# Altium PCB PCB.PcbDoc
Units mm, origin at the board's own origin, x right, y up, seen from the top; angles counter-clockwise.
Board outline 113.79 x 103.63 mm, 2 copper layers (Top Layer, Bottom Layer); 31 components, 25 nets, 89 pads, 6 vias.
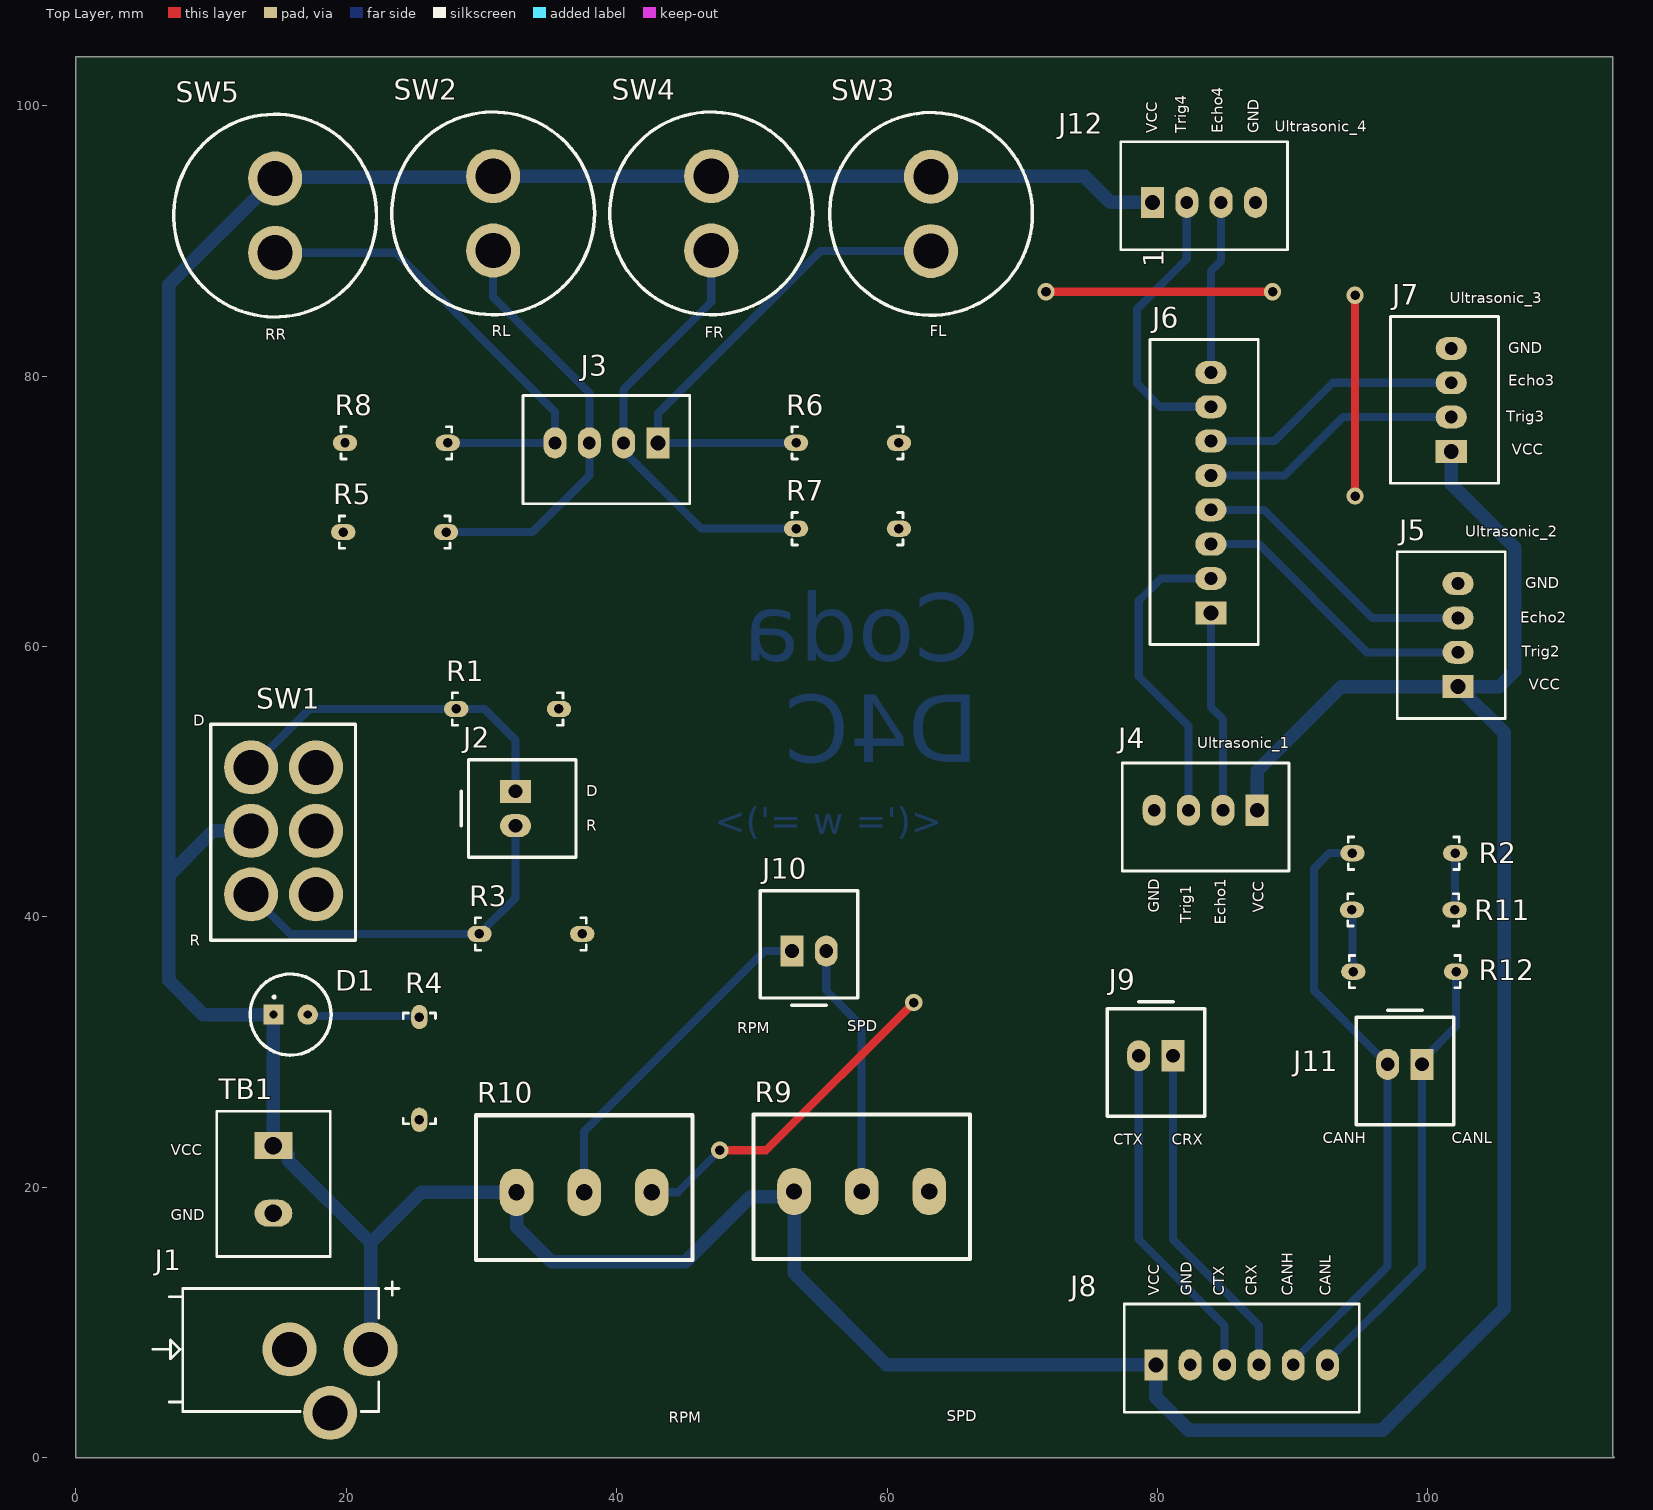
[diagram p0: Top Layer view]
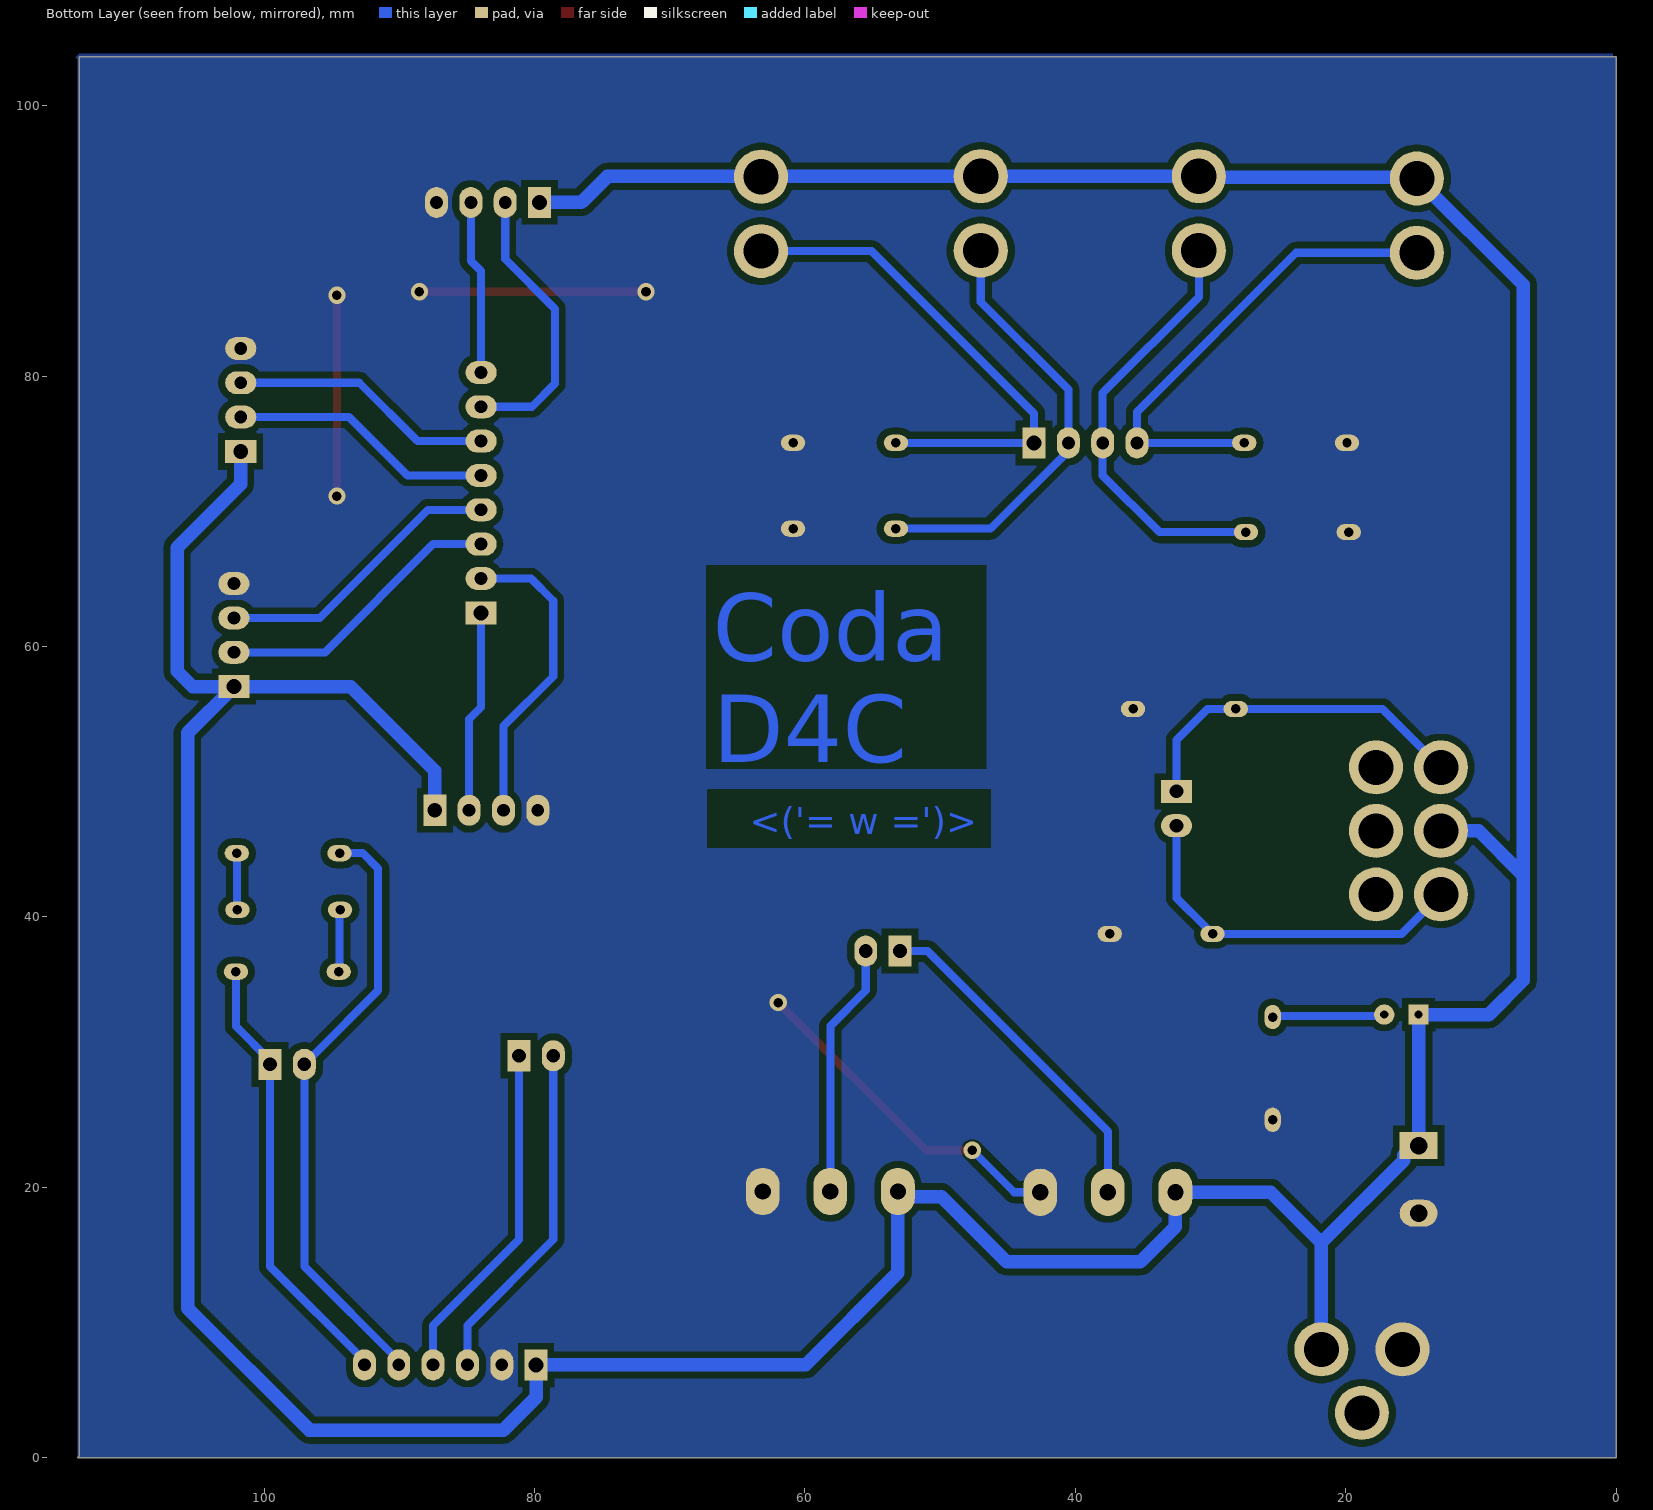
[diagram p1: Bottom Layer view, seen from below]
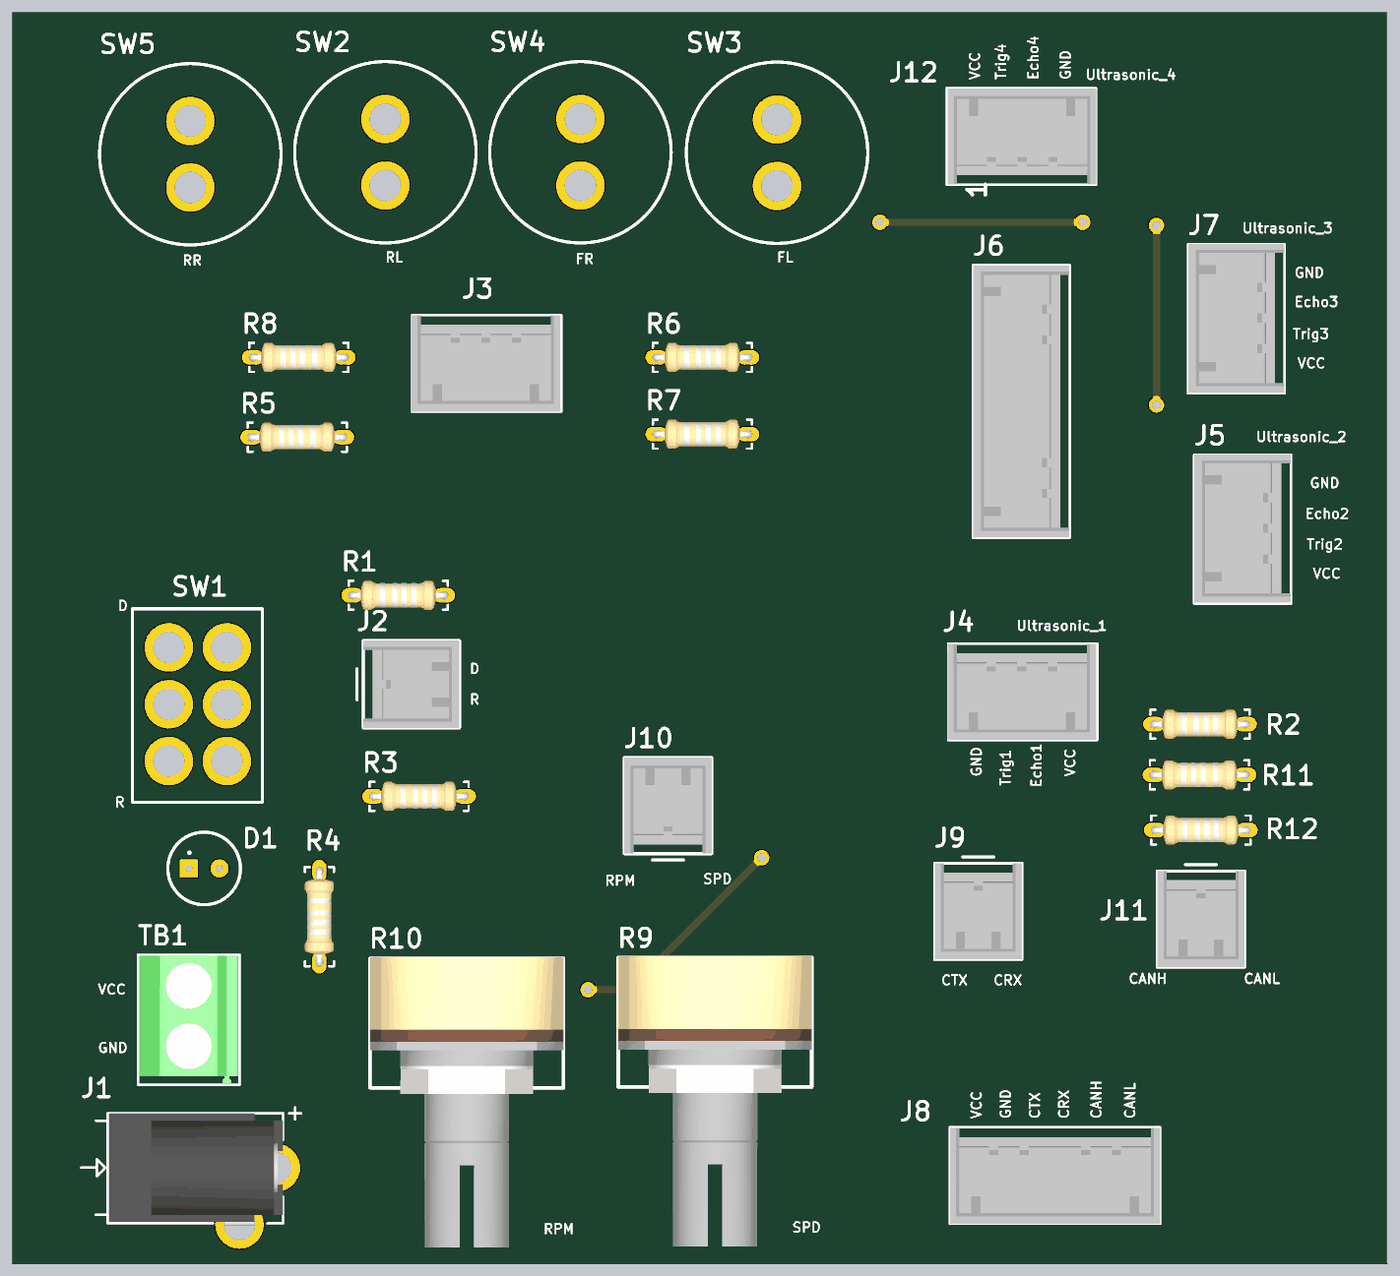
[diagram p2: 3D render of the assembled board from above, using the file's embedded part models]

## Layer stack, top to bottom
Top Solder: solder mask 0.0102, Solder Resist, Dk 3.5
Top Layer: signal copper 0.0356
Dielectric 1: dielectric 0.32, FR-4, Dk 4.8
Bottom Layer: signal copper 0.0356
Bottom Solder: solder mask 0.0102, Solder Resist, Dk 3.5

## Board outline
0,0 113.792,0 113.665,0.127 113.665,103.632 0,103.632

## Design rules (kind name [scope] priority, off if disabled: settings)
Clearance [All] p1: gap=0.5 ignorepadtopadclearanceinfootprint=FALSE
PolygonConnect [All] p1: connectstyle=Direct reliefconductorwidth=0.254 reliefentries=4 polygonreliefangle="90 Angle" airgapwidth=0.254
RoutingVias [All] p1: holewidth=0.711 width=1.27 viastyle="Through Hole" minholewidth=0.711 minwidth=1.27 maxholewidth=0.711 maxwidth=1.27
SolderMaskExpansion [All] p1: expansion=0.102 istentingtop=FALSE
Width [All] p1: maxlimit=1 minlimit=0.4 preferedwidth=0.6 minimp=50.000000 maximp=50.000000 favimp=50.000000
30 further rules are at their usual default settings.

## Components (designator, comment, footprint, x,y, rotation, side; value= is the part's Value field where it differs from the comment)
D1 "LED_TH_5mm" LED_TH_5mm 14.605,32.766 r0 top
J1 "Barrel Power Jack" pwr_Jack 21.799,8.001 r90 top
J2 "HDR SCK 1*2 100MILS" "DHDR 1*2 2,54MM" 32.512,48.006 r0 top
J3 "Data HDR 1x4 2.54mm" DHDR_1x4_2.54mm 37.973,75.057 r270 top
J4 "Ultrasonic_FL" DHDR_1x4_2.54mm 82.296,47.879 r270 top
J5 "Ultrasonic_FR" DHDR_1x4_2.54mm 102.235,62.103 r180 top
J6 "Data HDR 1x8 2.54mm" DHDR_1x8_2.54mm 83.947,62.484 r180 top
J7 "Ultrasonic_RL" DHDR_1x4_2.54mm 101.727,79.502 r180 top
J8 "MCP2551" DHDR_1x6_2.54mm 86.233,6.858 r90 top
J9 "HDR SCK 1*2 100MILS" "DHDR 1*2 2,54MM" 79.883,29.718 r270 top
J10 "HDR SCK 1*2 100MILS" "DHDR 1*2 2,54MM" 54.229,37.465 r90 top
J11 "HDR SCK 1*2 100MILS" "DHDR 1*2 2,54MM" 98.298,29.083 r270 top
J12 "Ultrasonic_RR" DHDR_1x4_2.54mm 84.709,92.837 r90 top
R1 "10k" R_THT_CFR-25 34.925,55.372 r180 top
R2 "100" R_THT_CFR-25 101.219,44.704 r180 top
R3 "10k" R_THT_CFR-25 36.645,38.735 r180 top
R4 "10k" R_THT_CFR-25 25.4,25.781 r90 top
R5 "10k" R_THT_CFR-25 20.574,68.453 r0 top
R6 "10k" R_THT_CFR-25 60.071,75.057 r180 top
R7 "10k" R_THT_CFR-25 60.071,68.707 r180 top
R8 "10k" R_THT_CFR-25 20.701,75.057 r0 top
R9 "Speed" POT 58.119,19.685 r0 top
R10 "RPM" POT 37.592,19.62 r0 top
R11 "10" R_THT_CFR-25 95.181,40.513 r0 top
R12 "10" R_THT_CFR-25 101.288,35.941 r180 top
SW1 "1825910-6" DPDT_6Pin 12.629,50.68 r270 top
SW2 "1825910-6" Push_Button_10mm_2Pin 30.861,89.281 r90 top
SW3 "1825910-6" Push_Button_10mm_2Pin 63.246,89.242 r90 top
SW4 "1825910-6" Push_Button_10mm_2Pin 46.99,89.281 r90 top
SW5 "1825910-6" Push_Button_10mm_2Pin 14.732,89.115 r90 top
TB1 "TERM 1x2 5mm" Terminal_5mm 14.605,20.574 r0 top

## Footprints (in the part's own frame and the unit in brackets; to place one, negate y for a bottom-side part, rotate by r counter-clockwise, add the part's x,y. Pads: shape width x height; smd on the part's side, far side on the other; paste and mask are expansions set on the pad)
"DHDR 1*2 2,54MM" [mm]
  rect 2.3x1.7 hole 1.016: 1(0,1.27)
  oval 2.3x1.7 hole 1.016: 2(0,-1.27)
  silkscreen extent -4,-3.61 4.48,3.61, body extent -3.47,-3.61 4.48,3.61, height 10.43
DHDR_1x4_2.54mm [mm]
  rect 2.3x1.7 hole 1.1: 1(0,5.08)
  oval 2.3x1.7 hole 0.95: 2(0,2.54) 3(0,0) 4(0,-2.54)
  silkscreen extent -3.5,-4.9 4.5,7.43, body extent -3.47,-4.95 4.48,7.34, height 10.43
DHDR_1x6_2.54mm [mm]
  rect 2.3x1.7 hole 1.1: 1(0,6.35)
  oval 2.3x1.7 hole 0.95: 2(0,3.81) 3(0,1.27) 4(0,-1.27) 5(0,-3.81) 6(0,-6.35)
  silkscreen extent -3.5,-8.7 4.5,8.7, body extent -3.51,-8.69 4.44,8.69, height 10.43
DHDR_1x8_2.54mm [mm]
  rect 2.3x1.7 hole 1.1: 1(0,0)
  oval 2.3x1.7 hole 0.95: 2(0,-2.54) 3(0,-5.08) 4(0,-7.62) 5(0,-10.16) 6(0,-12.7) 7(0,-15.24) 8(0,-17.78)
  silkscreen extent -3.5,-20.22 4.5,2.35, body extent -3.47,-20.17 4.48,2.29, height 10.43
DPDT_6Pin [mm]
  round 4 hole 2.6: 1(-0.375,5.125) 2(-0.375,0.325) 3(4.325,5.125) 4(4.325,0.325) 5(9.025,5.125) 6(9.025,0.325)
  silkscreen extent -3.58,-2.68 12.42,8.05, body extent -2.73,-4.2 11.47,10, height 19.77
LED_TH_5mm [mm]
  rect 1.5x1.5 hole 0.6: A(0,0)
  round 1.5 hole 0.6: C(2.54,0)
  silkscreen extent -1.73,-3 4.27,3
POT [mm]
  oval 2.5x3.5 hole 1.2: 1(-5,0) 2(5,0) 3(0,0)
  silkscreen extent -8,-5 8,5.7, body extent -8,-18.2 8,5.8, height 21
Push_Button_10mm_2Pin [mm]
  round 4 hole 2.6: 1(0,0) 2(5.5,0)
  silkscreen extent -4.75,-7.5 10.25,7.5, body extent -3.21,-5.92 8.81,6.1, height 5.99
pwr_Jack [mm]
  round 4 hole 2.6: 1(0,0) 2(-4.7,3) 3(0,6)
  silkscreen extent -4.6,-2.1 5,16.1, body extent -4.8,-0.6 4.5,13.8, height 11.01
R_THT_CFR-25 [mm]
  oval 1.8x1.2 hole 0.7: 1(-0.8,0) 2(6.8,0)
  silkscreen extent -1.1,-1.2 7.1,1.2, body extent -1.08,-1.2 7.09,1.2, height 1.9
Terminal_5mm [mm]
  rect 2.8x2 hole 1.3: 1(0,2.5)
  oval 2.8x2 hole 1.3: 2(0,-2.5)
  silkscreen extent -4.2,-5.7 4.2,5.05, body extent -4.08,-5.58 4.07,4.98, height 10.01

## Part data
J1: library part Con-Jack, "DC-Power Socket 12V 5A 2, 1mm Solder Eyel", Current Rating=5A, Manufacturer 1=Cliff, Manufacturer Part Number 1=FC68148, Supplier Part Number 1=735742, ComponentLink1Description=http://www.farnell.com/datasheets/317160.pdf?src-supplier=Farnell, ComponentLink1URL=http://www.farnell.com/datasheets/317160.pdf?src-supplier=Farnell, ComponentLink2Description=http://www.rapidonline.com/pdf/735742_da_en_01.pdf?src-supplier=Rapid+Electronics, ComponentLink2URL=http://www.rapidonline.com/pdf/735742_da_en_01.pdf?src-supplier=Rapid+Electronics, ComponentLink3Description=http://www.produktinfo.conrad.com/datenblaetter/725000-749999/735742-da-01-en-DC_BUCHSE_2_1MM_FC68148.pdf?src-supplier=Conrad, ComponentLink3URL=http://www.produktinfo.conrad.com/datenblaetter/725000-749999/735742-da-01-en-DC_BUCHSE_2_1MM_FC68148.pdf?src-supplier=Conrad, Connector Type=Socket, Height=0.25inch, Inside Diameter=6.3mm, Length=5inch, Orientation="Right Angle", Parameter Name 1=Bulk, RoHS=Yes, Supplier 1=Conrad, Weight=0.1lb, Width=3inch
J2 J9 J10 J11: library part "2-Pin Data Connector", "Conn Shrouded Header HDR 2 POS 2.54mm Solder ST Thru-Hole", Color=Black, Contact Current Rating=5A, Contact Resistance=6mR, Flammability Rating="UL94 V-0", Manufacturer 1="TE Connectivity", Manufacturer Part Number 1=2-644861-2, Max Operating Temperature=221°C, Max Voltage Rating (AC)=250V, Min Operating Temperature=-67°C, Package Quantity=500, Supplier Part Number 1=A30931-ND, Approvals=CSA, Backwall/Post Interruptions="No (Without)", ComponentLink1Description=https://datasheet.ciiva.com/16303/eng-ds-82056-mta-0608-16303634.pdf?src-supplier=Future+Electronics, ComponentLink1URL=https://datasheet.ciiva.com/16303/eng-ds-82056-mta-0608-16303634.pdf?src-supplier=Future+Electronics, ComponentLink2Description=https://datasheet.ciiva.com/30111/8852eng-ds-82056-mta-0608-30111398.pdf?src-supplier=Onlinecomponents.com, ComponentLink2URL=https://datasheet.ciiva.com/30111/8852eng-ds-82056-mta-0608-30111398.pdf?src-supplier=Onlinecomponents.com, ComponentLink3Description=https://datasheet.ciiva.com/709/eng-cd-644861-n-basefilename-709739.pdf?src-supplier=Digi-Key, ComponentLink3URL=https://datasheet.ciiva.com/709/eng-cd-644861-n-basefilename-709739.pdf?src-supplier=Digi-Key, ComponentLink4Description=https://datasheet.ciiva.com/3118/eng-ds-82056-mta-0608-3118126.pdf?src-supplier=Avnet, ComponentLink4URL=https://datasheet.ciiva.com/3118/eng-ds-82056-mta-0608-3118126.pdf?src-supplier=Avnet, Connector System=Wire-to-Board, Connector Type=Plug,Header,Pin, Contact Gender=Male, Contact Material="Copper Alloy", Contact Mating Length=5.1mm, Contact Plating=Tin,Matte, Contact Post Length=3.56mm, Contact Retention="No (Without)", Contact Shape=Square, Contact Style=Straight, Current Rating=5A, Depth=7.95mm, ELV=Compliant, Fastening Type=Friction, Gender=Male, Height=10.41mm, Housing Color=Black, Housing Material=Polyester, Lead Free="Lead Free", Length=7.21mm, Mating Alignment="Yes (With)", Mating Retention="Yes (With)", Mount="Through Hole", Number of Contacts=2, Number of Positions=2, Number of Rows=1, Orientation=Straight, Packaging=Bag, PCB Mount Alignment="No (Without)", PCB Mount Retention=Without, PCB Mounting Orientation=Vertical, PCB Thickness=0.063inch, Pitch=2.54mm, Plating Thickness=6.3um, Pricing 1="1=0.41000, 10=0.39200, 100=0.27420, 500=0.23506, 1000=0.19588, 5000=0.16790, 10000=0.15670 (USD)", Radiation Hardening=No, REACH SVHC=Unknown, RoHS=Yes, Sealable="No (Without)", Shrouded="Yes (With)", Stock 1=3206, Strain Relief="No (Without)", Supplier 1=Digi-Key, Tail Length=3.56mm, Termination=Solder, Underplate Material=Nickel, Voltage Rating=250V, Voltage Rating (AC)=250V
J3 J4 J5 J7 J12: library part "4-Pin Data Connector", "MTA-100 Series, 2.54mm Pitch 4 Way 1 RowStraight PCB Header, Solder Term, 5A", Color=Black, Contact Current Rating=5A, Contact Resistance=6mR, Flammability Rating="UL94 V-0", Manufacturer 1="TE Connectivity", Manufacturer Part Number 1=2-644861-4, Max Operating Temperature=221°C, Max Voltage Rating (AC)=250V, Min Operating Temperature=-67°C, Package Quantity=500, Supplier Part Number 1=A30933-ND, Approvals=CSA, Backwall/Post Interruptions="No (Without)", ComponentLink1Description=https://datasheet.ciiva.com/7800/1651878-7800290.pdf?src-supplier=Element14, ComponentLink1URL=https://datasheet.ciiva.com/7800/1651878-7800290.pdf?src-supplier=Element14, ComponentLink2Description=https://datasheet.ciiva.com/15175/getdatasheetpartid-36841-15175492.pdf?src-supplier=Verical, ComponentLink2URL=https://datasheet.ciiva.com/15175/getdatasheetpartid-36841-15175492.pdf?src-supplier=Verical, ComponentLink3Description=https://datasheet.ciiva.com/11759/0900766b80f915a0-11759930.pdf?src-supplier=RSComponents, ComponentLink3URL=https://datasheet.ciiva.com/11759/0900766b80f915a0-11759930.pdf?src-supplier=RSComponents, ComponentLink4Description=https://datasheet.ciiva.com/714/eng-cd-644861-n-basefilename-714593.pdf?src-supplier=Digi-Key, ComponentLink4URL=https://datasheet.ciiva.com/714/eng-cd-644861-n-basefilename-714593.pdf?src-supplier=Digi-Key, ComponentLink5Description=https://datasheet.ciiva.com/16684/eng-ds-82056-mta-0608-16684709.pdf?src-supplier=Avnet+Europe, ComponentLink5URL=https://datasheet.ciiva.com/16684/eng-ds-82056-mta-0608-16684709.pdf?src-supplier=Avnet+Europe, ComponentLink6Description=https://datasheet.ciiva.com/16497/eng-ds-82056-mta-0608-16497871.pdf?src-supplier=Avnet+Asia, ComponentLink6URL=https://datasheet.ciiva.com/16497/eng-ds-82056-mta-0608-16497871.pdf?src-supplier=Avnet+Asia, Connector System=Wire-to-Board, Connector Type=Plug,Header,Pin, Contact Gender=Male, Contact Material="Copper Alloy", Contact Mating Length=5.1mm, Contact Plating=Tin,Matte, Contact Post Length=3.56mm, Contact Retention="No (Without)", Contact Shape=Square, Contact Style=Straight, Current Rating=5A, Depth=7.95mm, ELV=Compliant, Fastening Type=Friction, Gender=Male, Height=10.41mm, Housing Color=Black, Housing Material=Polyester, Lead Free="Lead Free", Length=12.29mm, Mating Alignment="Yes (With)", Mating Retention="Yes (With)", Mount="Through Hole", Number of Contacts=4, Number of Positions=4, Number of Rows=1, Orientation=Straight, Packaging="Loose Piece", PCB Mount Alignment="No (Without)", PCB Mount Retention=Without, PCB Mounting Orientation=Vertical, PCB Thickness=0.063inch, Pitch=2.54mm, Plating Thickness=6.35um, Pricing 1="1=0.79000, 10=0.74100, 100=0.56790, 500=0.49380, 1000=0.40739, 5000=0.35801, 10000=0.33332 (USD)", Radiation Hardening=No, REACH SVHC=Unknown, RoHS=Yes, Sealable="No (Without)", Shrouded="Yes (With)", Stock 1=18767, Strain Relief="No (Without)", Supplier 1=Digi-Key, Tail Length=3.56mm, Termination=Solder, Underplate Material=Nickel, Voltage Rating=250V, Voltage Rating (AC)=250V
J6: library part PinHeader_8Pin, "CONN HEADER VERT 8POS .100 TIN", Color=Black, Contact Current Rating=5A, Contact Resistance=6mR, Flammability Rating="UL94 V-0", Manufacturer 1="TE Connectivity", Manufacturer Part Number 1=2-644861-8, Max Operating Temperature=221°C, Max Voltage Rating (AC)=250V, Min Operating Temperature=-67°C, Package Quantity=1000, Supplier Part Number 1=A30937-ND, Approvals=CSA, Backwall/Post Interruptions="No (Without)", ComponentLink1Description=https://datasheet.ciiva.com/16303/2-644861-8-16303640.pdf?src-supplier=Future+Electronics, ComponentLink1URL=https://datasheet.ciiva.com/16303/2-644861-8-16303640.pdf?src-supplier=Future+Electronics, ComponentLink2Description=https://datasheet.ciiva.com/11745/0900766b81026688-11745886.pdf?src-supplier=RSComponents, ComponentLink2URL=https://datasheet.ciiva.com/11745/0900766b81026688-11745886.pdf?src-supplier=RSComponents, ComponentLink3Description=https://datasheet.ciiva.com/709/eng-cd-644861-n-basefilename-709773.pdf?src-supplier=Digi-Key, ComponentLink3URL=https://datasheet.ciiva.com/709/eng-cd-644861-n-basefilename-709773.pdf?src-supplier=Digi-Key, ComponentLink4Description=https://datasheet.ciiva.com/9478/eng-ds-82056-mta-0608-9478367.pdf?src-supplier=Avnet, ComponentLink4URL=https://datasheet.ciiva.com/9478/eng-ds-82056-mta-0608-9478367.pdf?src-supplier=Avnet, ComponentLink5Description=https://datasheet.ciiva.com/16684/eng-ds-82056-mta-0608-16684159.pdf?src-supplier=Avnet+Europe, ComponentLink5URL=https://datasheet.ciiva.com/16684/eng-ds-82056-mta-0608-16684159.pdf?src-supplier=Avnet+Europe, Connector System=Wire-to-Board, Connector Type=Plug,Header,Pin, Contact Gender=Male, Contact Material="Copper Alloy", Contact Mating Length=5.1mm, Contact Plating=Tin,Matte, Contact Post Length=3.56mm, Contact Retention="No (Without)", Contact Shape=Square, Contact Style=Straight, Current Rating=5A, Depth=7.95mm, Fastening Type=Friction, Gender=Male, Height=10.41mm, Housing Color=Black, Housing Material=Polyester, Length=22.45mm, Mating Alignment="Yes (With)", Mating Retention="Yes (With)", Mount="Through Hole", Number of Contacts=8, Number of Positions=8, Number of Rows=1, Orientation=Straight, Packaging=Bulk, PCB Mount Alignment="No (Without)", PCB Mount Retention=Without, PCB Mounting Orientation=Vertical, PCB Thickness=0.063inch, Pitch=2.54mm, Plating Thickness=6.3um, Pricing 1="1=0.62000, 10=0.58100, 100=0.44530, 500=0.38726, 1000=0.31949, 5000=0.28076, 10000=0.26140 (USD)", Radiation Hardening=No, REACH SVHC=Unknown, RoHS=Yes, Sealable="No (Without)", Stock 1=1996, Strain Relief="No (Without)", Supplier 1=Digi-Key, Tail Length=3.56mm, Termination=Solder, Underplate Material=Nickel, Voltage Rating=250V
J8: library part "6-Pin Data Connector", "CONN HEADER VERT 6POS .100 TIN", Color=Black, Contact Current Rating=5A, Contact Resistance=6mR, Flammability Rating="UL94 V-0", Manufacturer 1="TE Connectivity", Manufacturer Part Number 1=2-644861-6, Max Operating Temperature=221°C, Max Voltage Rating (AC)=250V, Min Operating Temperature=-67°C, Package Quantity=1000, Supplier Part Number 1=A30935-ND, Approvals=CSA, Backwall/Post Interruptions="No (Without)", ComponentLink1Description=https://datasheet.ciiva.com/30493/0900766b80f915a1-30493314.pdf?src-supplier=RSComponents, ComponentLink1URL=https://datasheet.ciiva.com/30493/0900766b80f915a1-30493314.pdf?src-supplier=RSComponents, ComponentLink2Description=https://datasheet.ciiva.com/16303/2-644861-6-16303636.pdf?src-supplier=Future+Electronics, ComponentLink2URL=https://datasheet.ciiva.com/16303/2-644861-6-16303636.pdf?src-supplier=Future+Electronics, ComponentLink3Description=https://datasheet.ciiva.com/16684/eng-ds-82056-mta-0608-16684438.pdf?src-supplier=Avnet+Europe, ComponentLink3URL=https://datasheet.ciiva.com/16684/eng-ds-82056-mta-0608-16684438.pdf?src-supplier=Avnet+Europe, ComponentLink4Description=https://datasheet.ciiva.com/15175/getdatasheetpartid-36761-15175467.pdf?src-supplier=Verical, ComponentLink4URL=https://datasheet.ciiva.com/15175/getdatasheetpartid-36761-15175467.pdf?src-supplier=Verical, ComponentLink5Description=https://datasheet.ciiva.com/714/eng-cd-644861-n-basefilename-714750.pdf?src-supplier=Digi-Key, ComponentLink5URL=https://datasheet.ciiva.com/714/eng-cd-644861-n-basefilename-714750.pdf?src-supplier=Digi-Key, ComponentLink6Description=https://datasheet.ciiva.com/30135/8852eng-ds-82056-mta-0608-30135278.pdf?src-supplier=Onlinecomponents.com, ComponentLink6URL=https://datasheet.ciiva.com/30135/8852eng-ds-82056-mta-0608-30135278.pdf?src-supplier=Onlinecomponents.com, ComponentLink7Description=https://datasheet.ciiva.com/3118/eng-ds-82056-mta-0608-3118127.pdf?src-supplier=Avnet, ComponentLink7URL=https://datasheet.ciiva.com/3118/eng-ds-82056-mta-0608-3118127.pdf?src-supplier=Avnet, Connector System=Wire-to-Board, Connector Type=Plug,Header,Pin, Contact Gender=Male, Contact Material="Copper Alloy", Contact Mating Length=5.1mm, Contact Plating=Tin,Matte, Contact Post Length=3.56mm, Contact Retention="No (Without)", Contact Shape=Square, Contact Style=Straight, Current Rating=5A, Depth=7.95mm, Fastening Type=Friction, Height=10.41mm, Housing Color=Black, Housing Material=Polyester, Length=0.684inch, Mating Alignment="Yes (With)", Mating Retention="Yes (With)", Mount="Through Hole", Number of Contacts=6, Number of Positions=6, Number of Rows=1, Orientation=Straight, Parameter Name 1=Box, PCB Mount Alignment="No (Without)", PCB Mount Retention=Without, PCB Mounting Orientation=Vertical, PCB Thickness=0.063inch, Pitch=2.54mm, Plating Thickness=6.3um, Pricing 1="1=1.04000, 10=0.91900, 100=0.79250, 500=0.64840, 1000=0.57635, 5000=0.50431, 10000=0.47909 (USD)", Radiation Hardening=No, REACH SVHC=Unknown, RoHS=Yes, Sealable="No (Without)", Stock 1=208, Strain Relief="No (Without)", Supplier 1=Digi-Key, Tail Length=3.56mm, Termination=Solder, Underplate Material=Nickel, Voltage Rating=250V
R1 R2 R3 R4 R5 R6 R7 R8 R11 R12: library part "TH CFR-25 Resis", "CFR Series 0.25 W 1 KOhm ±5 % -350 to 500 ppm/°C Carbon Film Resistor", Case/Package=Axial, Manufacturer 1=Yageo, Manufacturer Part Number 1=CFR-25JB-52-1K, Max Operating Temperature=155°C, Max Power Dissipation=250mW, Min Operating Temperature=-55°C, Package Quantity=200, Resistance=1kR, Resistor Type="Carbon Film", Supplier Part Number 1=1.0KQBK-ND, Temperature Coefficient=500ppm/°C, Tolerance=5%, ComponentLink1Description=http://www.yageo.com/NewPortal/yageodocoutput?fileName=/pdf/throughhole/Yageo_LR_CFR_2013.pdf&src-supplier=Digi-Key, ComponentLink1URL=http://www.yageo.com/NewPortal/yageodocoutput?fileName=/pdf/throughhole/Yageo_LR_CFR_2013.pdf&src-supplier=Digi-Key, ComponentLink2Description=http://www.yageo.com/documents/recent/General%20Type_CFR.pdf?src-supplier=Future+Electronics, ComponentLink2URL=http://www.yageo.com/documents/recent/General%20Type_CFR.pdf?src-supplier=Future+Electronics, Lead Free="Lead Free", Length=0.248inch, Number of Terminations=2, Parameter Name 1=Bulk, Power Rating=250mW, Pricing 1="1=0.10000, 25=0.04680, 50=0.03640, 100=0.02600, 250=0.02028, 500=0.01612, 750=0.01379, 1000=0.01144, 2000=0.00988 (USD)", RoHS=Yes, Stock 1=194074, Supplier 1=Digi-Key
R9 R10: library part POT
SW1: library part DPDT_6Pin, "SWITCH TACTILE SPST-NO 0.05A 24V", Contact Current Rating=50mA, Contact Resistance=100mR, Manufacturer 1="TE Connectivity Alcoswitch", Max Operating Temperature=85°C, Max Voltage Rating (DC)=24V, Min Operating Temperature=-35°C, Operating Force=160gf, Package Quantity=750, Supplier Part Number 1=450-1650-ND, Actuator Length=0.055inch, Actuator Material=PBT, Actuator Type=Standard, ComponentLink1Description=https://datasheet.ciiva.com/30199/1825910-6rqpn1825910-6-30199520.pdf?src-supplier=Onlinecomponents.com, ComponentLink1URL=https://datasheet.ciiva.com/30199/1825910-6rqpn1825910-6-30199520.pdf?src-supplier=Onlinecomponents.com, ComponentLink2Description=https://datasheet.ciiva.com/15184/getdatasheetpartid-395915-15184509.pdf?src-supplier=Verical, ComponentLink2URL=https://datasheet.ciiva.com/15184/getdatasheetpartid-395915-15184509.pdf?src-supplier=Verical, Contact Material="Copper Alloy", Contact Plating=Silver, Electrical Life=100000Cycles, ELV=Compliant, Illumination Type=Non-Illuminated,Illuminated, Lead Free="Lead Free", Length=5.99mm, Manufacturer Part Number 1=1825910-6, Max Current Rating=50mA, Mechanical Life=100000Cycles, Mount="Through Hole", Orientation=Straight, Parameter Name 1="Loose Piece", Pricing 1="1=0.10000, 10=0.10100, 25=0.09560, 100=0.08700, 250=0.08180, 500=0.07484, 1000=0.06265, 5000=0.05743, 10000=0.05395 (USD)", REACH SVHC=Unknown, RoHS=Yes, Stock 1=115702, Supplier 1=Digi-Key, Switch Function=Off-Mom, Switch Travel=0.25mm, Termination="PC Pins", Throw Configuration=SPST, Type=Switch
SW2 SW3 SW4 SW5: library part Push_Button_10mm_2Pin, "SWITCH TACTILE SPST-NO 0.05A 24V", Contact Current Rating=50mA, Contact Resistance=100mR, Manufacturer 1="TE Connectivity Alcoswitch", Max Operating Temperature=85°C, Max Voltage Rating (DC)=24V, Min Operating Temperature=-35°C, Operating Force=160gf, Package Quantity=750, Supplier Part Number 1=450-1650-ND, Actuator Length=0.055inch, Actuator Material=PBT, Actuator Type=Standard, ComponentLink1Description=https://datasheet.ciiva.com/30199/1825910-6rqpn1825910-6-30199520.pdf?src-supplier=Onlinecomponents.com, ComponentLink1URL=https://datasheet.ciiva.com/30199/1825910-6rqpn1825910-6-30199520.pdf?src-supplier=Onlinecomponents.com, ComponentLink2Description=https://datasheet.ciiva.com/15184/getdatasheetpartid-395915-15184509.pdf?src-supplier=Verical, ComponentLink2URL=https://datasheet.ciiva.com/15184/getdatasheetpartid-395915-15184509.pdf?src-supplier=Verical, Contact Material="Copper Alloy", Contact Plating=Silver, Electrical Life=100000Cycles, ELV=Compliant, Illumination Type=Non-Illuminated,Illuminated, Lead Free="Lead Free", Length=5.99mm, Manufacturer Part Number 1=1825910-6, Max Current Rating=50mA, Mechanical Life=100000Cycles, Mount="Through Hole", Orientation=Straight, Parameter Name 1="Loose Piece", Pricing 1="1=0.10000, 10=0.10100, 25=0.09560, 100=0.08700, 250=0.08180, 500=0.07484, 1000=0.06265, 5000=0.05743, 10000=0.05395 (USD)", REACH SVHC=Unknown, RoHS=Yes, Stock 1=115702, Supplier 1=Digi-Key, Switch Function=Off-Mom, Switch Travel=0.25mm, Termination="PC Pins", Throw Configuration=SPST, Type=Switch
TB1: library part "Terminal BLK Green", "PHOENIX CONTACT         MKDSN 1,5/ 2             Wire-To-Board Terminal Block, 5 mm, 2 Ways, 26 AWG, 16 AWG, 1.5 mm, Screw", Color=Green, Current=10A, Current Rating=13.5A, Flammability Rating="UL94 V-0", Manufacturer 1="Phoenix Contact", Manufacturer Part Number 1=1729018, Max Supply Voltage=250V, Package Quantity=50, Supplier Part Number 1=651-1729018, Voltage=300V, Voltage Rating=400V, Approvals=UL,CSA,cULus,CB, ComponentLink1Description=https://datasheet.ciiva.com/16071/1729018-16071814.pdf?src-supplier=Onlinecomponents.com, ComponentLink1URL=https://datasheet.ciiva.com/16071/1729018-16071814.pdf?src-supplier=Onlinecomponents.com, ComponentLink2Description=https://datasheet.ciiva.com/832/1729018-832055.pdf?src-supplier=Digi-Key, ComponentLink2URL=https://datasheet.ciiva.com/832/1729018-832055.pdf?src-supplier=Digi-Key, ComponentLink3Description=https://datasheet.ciiva.com/15169/getdatasheetpartid-177860-15169643.pdf?src-supplier=Verical, ComponentLink3URL=https://datasheet.ciiva.com/15169/getdatasheetpartid-177860-15169643.pdf?src-supplier=Verical, ComponentLink4Description=https://datasheet.ciiva.com/14607/70054375-14607356.pdf?src-supplier=Allied+Electronics, ComponentLink4URL=https://datasheet.ciiva.com/14607/70054375-14607356.pdf?src-supplier=Allied+Electronics, ComponentLink5Description=https://datasheet.ciiva.com/33105/1729018-33105978.pdf?src-supplier=Today+Components, ComponentLink5URL=https://datasheet.ciiva.com/33105/1729018-33105978.pdf?src-supplier=Today+Components, Connector Type=Screw, Contact Material=Tin, Depth=8.1mm, Gender=Male, Height=13.5mm, Housing Color=Green, Housing Material=Polyamide, Insulation Material=Nylon, Lead Free="Lead Free", Length=8.1mm, Material=Polyamide, Max Current Rating=13.5A, Mount="Through Hole", Number of Circuits=2, Number of Contacts=2, Number of Levels=1, Number of Pins=2, Number of Poles=2, Number of Positions=2, Number of Positions Per Level=2, Number of Rows=1, Orientation=Straight, Parameter Name 1=Bulk, Pitch=5mm, Pricing 1="1=1.10000, 10=1.05000, 50=1.01000, 100=0.97400, 250=0.91000, 500=0.83800 (USD)", Radiation Hardening=No, REACH SVHC=Unknown, RoHS=Yes, Stock 1=6371, Stripping Length=6mm, Supplier 1=Mouser, Termination=Screw, Weight=0.06949oz, Width=13.5mm, Wire Gauge (Max)=26AWG, Wire Gauge (Min)=26AWG, Wire/Cable Gauge=26AWG

## Via types
v1: diameter 1.27, hole 0.711, Top Layer to Bottom Layer, 6 vias

## Nets (pads, with @x,y where several pads share a name; then routed paths per layer and width w, separated by ;. In a path a pad name is that pad's centre, name@x,y a point inside that pad or via, vN(x,y) a via of type N, cw(c..) or ccw(c..) an arc to the next point about the centre after c; other vN are vias at no path point)
CANH: J8.5 J11.2 R2.2 | length 45.2
  Bottom Layer w0.6: J8.5 90.043,7.158 97.028,14.143 97.028,29.085 96.243,29.87 96.241,29.87 91.567,34.544 91.567,43.561 92.71,44.704 R2.2
CANL: J8.6 J11.1 R12.1 | length 33
  Bottom Layer w0.6: J8.6 92.583,7.158 99.568,14.143 J11.1 99.568,29.383 102.088,31.903 R12.1
CRX: J8.4 J9.1 | length 25.5
  Bottom Layer w0.6: J9.1 81.153,16.129 87.503,9.779 J8.4
CTX: J8.3 J9.2 | length 25.5
  Bottom Layer w0.6: J9.2 78.613,16.129 84.963,9.779 J8.3
Echo1: J4.3 J6.2 | length 23
  Bottom Layer w0.6: J4.3 82.296,54.102 78.613,57.785 78.613,63.373 80.264,65.024 J6.2
Echo2: J5.3 J6.4 | length 21.6
  Bottom Layer w0.6: J6.4 87.884,70.104 95.885,62.103 J5.3
Echo3: J6.6 J7.3 | length 19.6
  Bottom Layer w0.6: J6.6 88.646,75.184 92.964,79.502 J7.3
Echo4: J6.8 J12.3 | length 12.9
  Bottom Layer w0.6: J6.8 83.947,87.757 84.709,88.519 J12.3
FL_Door: J3.1 R6.2 SW3.1 | length 37.6
  Bottom Layer w0.6: R6.2 J3.1 43.053,77.216 55.079,89.242 SW3.1
FR_Door: J3.2 R7.2 SW4.1 | length 32.6
  Bottom Layer w0.6: SW4.1 46.99,85.471 40.513,78.994 J3.2 40.513,74.466 46.272,68.707 R7.2
GearD: J2.1 R1.2 SW1.2 | length 26.1
  Bottom Layer w0.6: SW1.2 17.271,55.372 R1.2 30.226,55.372 32.512,53.086 J2.1
GearR: J2.2 R3.2 SW1.6 | length 27.3
  Bottom Layer w0.6: SW1.6 15.874,38.735 R3.2 29.983,38.735 30.26,39.012 30.26,39.15 32.512,41.402 J2.2
GND: J1.3 J4.4 J5.4 J7.4 J8.2 J12.4 R1.1 R3.1 R4.1 R5.1 R6.1 R7.1 R8.1 R9.2 R10.2 TB1.2 | length 57.1
  Top Layer w0.6: v1(47.625,22.733) 51.054,22.733 v1(61.976,33.655) ; v1(71.755,86.233) v1(88.519,86.233) ; v1(94.615,71.12) v1(94.615,85.979)
  Bottom Layer w0.6: R10.2 44.512,19.62 v1(47.625,22.733) ; J7.4@101.427,82.042 J7.4
NetD1_C: D1.C R4.2 | length 8.3
  Bottom Layer w0.6: D1.C 17.237,32.674 25.307,32.674 R4.2
NetR2_1: R2.1 R11.2 | length 4.2
  Bottom Layer w0.6: R11.2 102,40.532 102,44.685 R2.1
NetR11_1: R11.1 R12.2 | length 4.6
  Bottom Layer w0.6: R11.1 94.434,40.459 94.434,35.995 R12.2
RL_Door: J3.3 R5.2 SW2.1 | length 31.9
  Bottom Layer w0.6: R5.2 33.782,68.453 37.973,72.644 J3.3 37.973,78.74 30.861,85.852 SW2.1
RPM_ADC: J10.1 R10.3 | length 25.4
  Bottom Layer w0.6: R10.3 37.592,24.13 50.927,37.465 J10.1
RR_Door: J3.4 R8.2 SW5.1 | length 35.8
  Bottom Layer w0.6: SW5.1 23.661,89.115 35.433,77.343 J3.4 R8.2
SpeedADC: J10.2 R9.3 | length 18.9
  Bottom Layer w0.6: J10.2 55.499,34.544 58.119,31.924 R9.3
Trig1: J4.2 J6.1 | length 15
  Bottom Layer w0.6: J6.1 83.947,55.499 84.836,54.61 J4.2
Trig2: J5.2 J6.3 | length 21.6
  Bottom Layer w0.6: J6.3 87.503,67.564 95.504,59.563 J5.2
Trig3: J6.5 J7.2 | length 19.6
  Bottom Layer w0.6: J6.5 89.408,72.644 93.726,76.962 J7.2
Trig4: J6.7 J12.2 | length 21.1
  Bottom Layer w0.6: J12.2 82.169,88.646 78.486,84.963 78.486,79.437 80.199,77.724 J6.7
VCC: D1.A J1.1 J4.1 J5.1 J7.1 J8.1 J12.1 R9.1 R10.1 SW1.4 SW2.2 SW3.2 SW4.2 SW5.2 TB1.1 | length 370.3
  Bottom Layer w1: SW1.4 10.16,46.355 6.858,43.053 ; SW5.2 6.858,86.741 6.858,43.053 ; SW5.2@14.732,94.698 30.778,94.698 SW2.2 SW4.2 47.009,94.761 74.607,94.761 76.532,92.837 J12.1 ; J1.1 21.799,15.88 ; J4.1 87.376,50.8 93.599,57.023 101.585,57.023 J5.1 ; J7.1 101.727,72.009 106.426,67.31 106.426,58.166 105.283,57.023 J5.1 ; 6.858,43.053 6.858,35.306 9.398,32.766 D1.A TB1.1 15.005,23.074 15.705,22.374 15.705,21.974 21.799,15.88 ; 21.799,15.88 25.539,19.62 R10.1 32.592,17.065 35.179,14.478 45.084,14.478 49.911,19.305 52.739,19.305 R9.1 53.119,13.683 59.944,6.858 J8.1 79.883,4.445 82.296,2.032 96.647,2.032 105.664,11.049 105.664,53.594 J5.1
pads on no net: J1.2 SW1.1 SW1.3 SW1.5

## Polygon pours and split planes (outlines as drawn)
GND on Bottom Layer "NONET_L02_P-001" (solid, remove dead copper, pour order 4): 0,103.632 113.728,103.632 113.792,103.695 113.792,0.064 0.064,0.064 0,0
GND on Bottom Layer "GND_L02_P000" (solid, remove dead copper, pour order 0): 0.254,0.191 0.381,0.064 113.792,0.064 113.792,103.441 113.919,103.569 113.665,103.822 0.254,103.822 0.254,0.064

## Other copper
Bottom Layer:
  text "Coda / D4C" at 66.802,51.435 h5
  text "<('= w =')>" at 47.236,46.093 h2

## Silkscreen, mask and mechanical layers (free items; w line width, h text height)
Top Overlay:
  text "Ultrasonic_4" at 88.669,98.073 h0.8
  text "VCC" at 79.987,97.94 h0.8 r90
  text "Trig4" at 82.133,97.94 h0.8 r90
  text "Echo4" at 84.813,97.94 h0.8 r90
  text "GND" at 87.48,97.94 h0.8 r90
  text "Ultrasonic_3" at 101.623,85.373 h0.8
  text "RL" at 30.757,82.954 h0.8
  text "FL" at 63.142,82.954 h0.8
  text "FR" at 46.505,82.827 h0.8
  text "RR" at 13.993,82.7 h0.8
  text "GND" at 105.941,81.684 h0.8
  text "Echo3" at 105.941,79.271 h0.8
  text "Trig3" at 105.814,76.617 h0.8
  text "VCC" at 106.195,74.191 h0.8
  text "Ultrasonic_2" at 102.766,68.101 h0.8
  text "GND" at 107.211,64.285 h0.8
  text "Echo2" at 106.83,61.745 h0.8
  text "Trig2" at 106.957,59.218 h0.8
  text "VCC" at 107.465,56.792 h0.8
  text "D" at 8.659,54.125 h0.8
  text "Ultrasonic_1" at 82.954,52.48 h0.8
  text "D" at 37.742,48.918 h0.8
  text "R" at 37.742,46.378 h0.8
  text "GND" at 80.114,40.282 h0.8 r90
  text "VCC" at 87.861,40.282 h0.8 r90
  text "Trig1" at 82.514,39.52 h0.8 r90
  text "Echo1" at 85.067,39.393 h0.8 r90
  text "R" at 8.405,37.869 h0.8
  text "SPD" at 57.046,31.519 h0.8
  text "RPM" at 48.918,31.392 h0.8
  text "CANH" at 92.225,23.264 h0.8
  text "CANL" at 101.75,23.264 h0.8
  text "CTX" at 76.731,23.137 h0.8
  text "CRX" at 81.049,23.137 h0.8
  text "VCC" at 7.008,22.375 h0.8
  text "GND" at 7.008,17.549 h0.8
  text "VCC" at 80.114,11.961 h0.8 r90
  text "GND" at 82.527,11.961 h0.8 r90
  text "CTX" at 84.94,11.961 h0.8 r90
  text "CRX" at 87.353,11.961 h0.8 r90
  text "CANH" at 90.02,11.961 h0.8 r90
  text "CANL" at 92.814,11.961 h0.8 r90
  text "SPD" at 64.412,2.69 h0.8
  text "RPM" at 43.838,2.563 h0.8

## Text inside footprints (layer, text, board x,y; h text height)
J12: Top Overlay "1" at 80.479,88.037 h1.5 r90